# Altium PCB 1.PcbDoc
Units mm, origin at the board's own origin, x right, y up, seen from the top; angles counter-clockwise.
Board outline 13.5 x 15 mm, 2 copper layers (Top Layer, Bottom Layer); 13 components, 11 nets, 47 pads, 18 vias.
Unrouted connection lines stored in the file: 6.
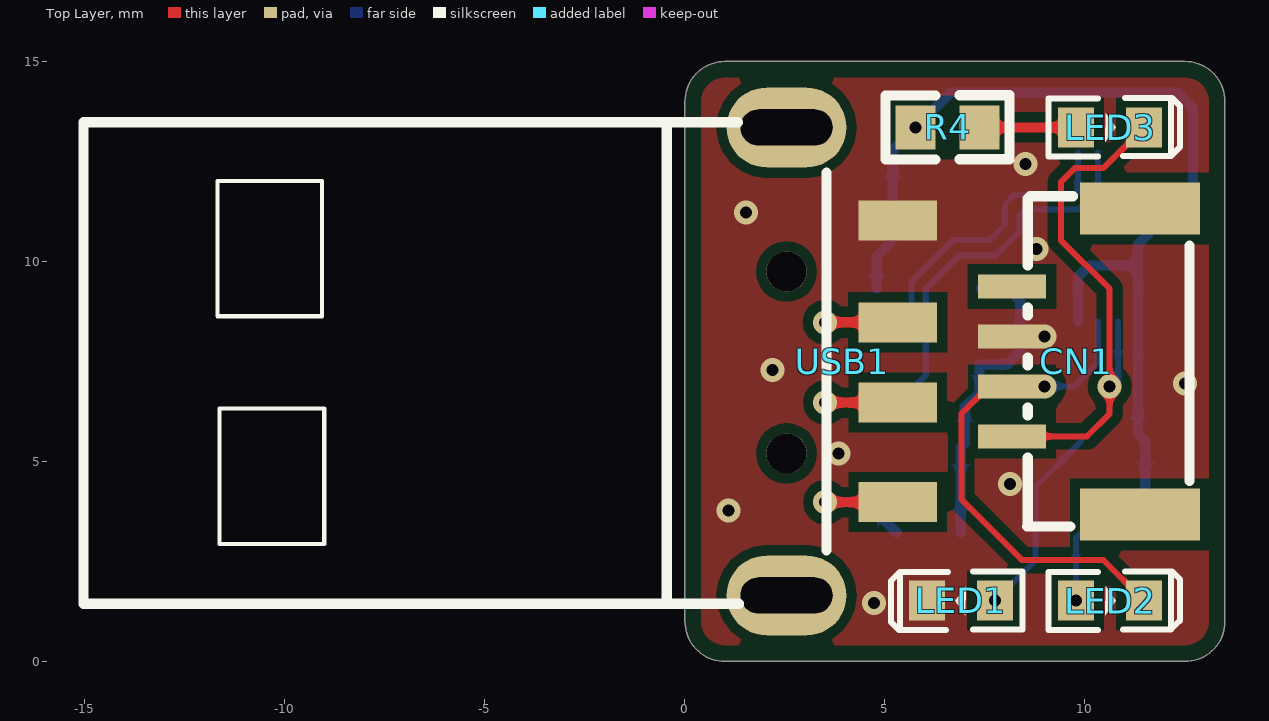
[diagram p0: Top Layer view]
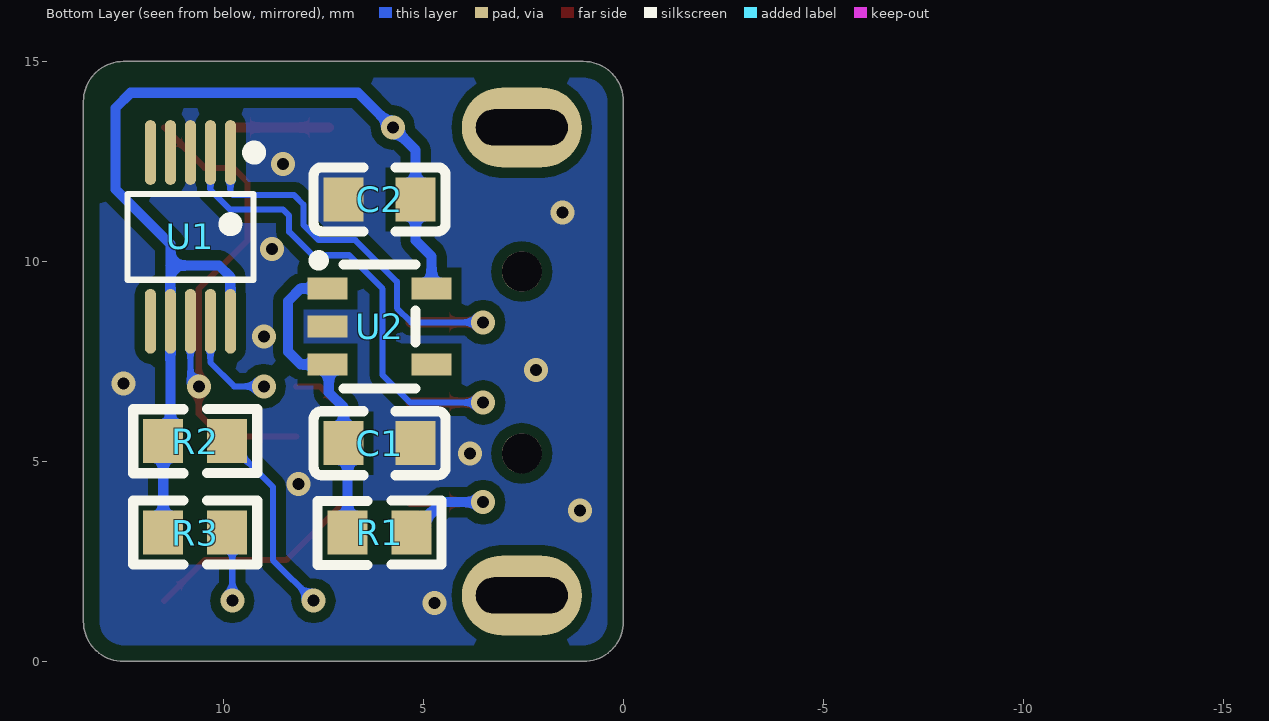
[diagram p1: Bottom Layer view, seen from below]

## Layer stack, top to bottom
Top Solder: solder mask 0.0102, Solder Resist, Dk 3.5
Top Layer: signal copper 0.0356
Dielectric 1: dielectric 0.32, FR-4, Dk 4.8
Bottom Layer: signal copper 0.0356
Bottom Solder: solder mask 0.0102, Solder Resist, Dk 3.5

## Board outline
0,1 ccw(c1,1) 1,0 12.5,0 ccw(c12.5,1) 13.5,1 13.5,14 ccw(c12.5,14) 12.5,15 1,15 ccw(c1,14) 0,14

## Design rules (kind name [scope] priority, off if disabled: settings)
BoardOutlineClearance [All] p1: gap=0.4 ignorepadtopadclearanceinfootprint=FALSE
Clearance Clearance_1 [InNamedPolygon('GND_L01_P000') Or  InNamedPolygon('GND_L02_P001')] p1: gap=0.254 ignorepadtopadclearanceinfootprint=FALSE except(0: Arc-Hole Track-Hole SMDPad-Hole THPad-Hole Via-Hole Fill-Hole Poly-Hole Region-Hole Text-Hole)
Clearance [All] p2: gap=0.152 ignorepadtopadclearanceinfootprint=FALSE
ComponentClearance [All] p1: gap=0 collisioncheckmode=3 verticalgap=0 showdistances=FALSE
MinimumSolderMaskSliver [All] p1: minsoldermaskwidth=0
PolygonConnect [All] p1: connectstyle=Direct reliefconductorwidth=0.254 reliefentries=4 polygonreliefangle="90 Angle" airgapwidth=0.254
RoutingVias [All] p1: holewidth=0.711 width=1.27 viastyle="Through Hole" minholewidth=0.711 minwidth=1.27 maxholewidth=0.711 maxwidth=1.27
SilkToSolderMaskClearance [IsPad] p1: minsilkscreentomaskgap=0 clearancetoexposedcopper=TRUE
SolderMaskExpansion [All] p1: expansion=0.102
Width [All] p1: maxlimit=0.254 minlimit=0.152 preferedwidth=0.152 minimp=50.000000 maximp=50.000000 favimp=50.000000
27 further rules are at their usual default settings.

## Components (designator, comment, footprint, x,y, rotation, side; value= is the part's Value field where it differs from the comment)
C1 "2.2uF" C0603 6.096,5.455 r180 bottom
C2 "2.2uF" C0603 6.096,11.551 r0 bottom
CN1 "A1257WR-S-4P" CONN-SMD_A1257WR-S-4P 9.779,7.5 r90 top
LED1 "LED-0603_R" LED0603_RED 6.897,1.518 r180 top
LED2 "LED-0603_R" LED0603_RED 10.629,1.518 r0 top
LED3 "LED-0603_R" LED0603_RED 10.629,13.35 r0 top
R1 "0R" R0603 6.096,3.22 r0 bottom
R2 "1k" R0603 10.706,5.506 r180 bottom
R3 "1k" R0603 10.706,3.22 r180 bottom
R4 "1k" R0603 6.566,13.35 r0 top
U1 "CH340E" MSOP-10_L3.0-W3.0-P0.50-LS5.0-BL 10.826,10.613 r180 bottom
U2 "WL2801E33-5/TR" SOT-23-5_L3.0-W1.7-P0.95-LS2.8-BR 6.096,8.376 r0 bottom
USB1 "" USB-TH_U-G-04WS-W-04 3.93,7.5 r270 top

## Footprints (in the part's own frame and the unit in brackets; to place one, negate y for a bottom-side part, rotate by r counter-clockwise, add the part's x,y. Pads: shape width x height; smd on the part's side, far side on the other; paste and mask are expansions set on the pad)
C0603 [mm]
  rect 1x1.1 smd: 1(-0.9,0) 2(0.9,0)
  silkscreen extent -1.65,-0.8 1.65,0.8
CONN-SMD_A1257WR-S-4P [mm]
  rect 0.6x1.7 smd: 1(1.874,1.6) 2(0.625,1.6) 3(-0.625,1.6) 4(-1.875,1.6)
  rect 1.3x3 smd: 5(3.825,-1.6) 6(-3.825,-1.6)
  silkscreen extent -4.13,-2.84 4.13,1.23
LED0603_RED [mm]
  rect 0.9x1 smd: 1(-0.85,0) 2(0.85,0)
  silkscreen extent -1.54,-0.73 1.75,0.73
MSOP-10_L3.0-W3.0-P0.50-LS5.0-BL [mm]
  oval 0.28x1.62 smd: 1(1,2.11) 2(0.5,2.11) 3(0,2.11) 4(-0.5,2.11) 5(-1,2.11) 6(-1,-2.11) 7(-0.5,-2.11) 8(0,-2.11) 9(0.5,-2.11) 10(1,-2.11)
  silkscreen extent -1.58,-1.07 1.74,2.26
R0603 [mm]
  rect 1x1.1 smd: 1(-0.8,0) 2(0.8,0)
  silkscreen extent -1.55,-0.8 1.55,0.81
SOT-23-5_L3.0-W1.7-P0.95-LS2.8-BR [mm]
  rect 1x0.55 smd: 1(1.3,-0.95) 2(1.3,0) 3(1.3,0.95) 4(-1.3,0.95) 5(-1.3,-0.95)
  silkscreen extent -0.9,-1.78 1.65,1.55
USB-TH_U-G-04WS-W-04 [mm]
  rect 1x1.96 smd: 1(3.518,1.39) 2(1.029,1.39) 3(-0.978,1.39) 4(-3.518,1.39)
  oval 2x3 hole 0.9 slot 2.3 at 90 deg: 5(5.85,-1.39) 6(-5.85,-1.39)
  round 1 hole 1 unplated: ""(-2.248,-1.39) ""(2.299,-1.39)
  silkscreen extent -5.98,-18.97 6.06,-0.39

## Part data
C1 C2: library part 0.1u, Contributor=LCEDA_Lib, nameAlias=Value(F), spicePre=C, spiceSymbolName=C_0603_US
CN1: BOM_Manufacturer="Changjiang Connectors", BOM_Manufacturer Part=A1257WR-S-4P, BOM_Supplier=LCSC, BOM_Supplier Part=C225127, Contributor=LCSC, spicePre=C, spiceSymbolName=A1257WR-S-4P
LED1 LED2 LED3: BOM_Manufacturer=EVERLIGHT(台湾, BOM_Manufacturer Part=19-217/R6C-AL1M2VY/3T, BOM_Supplier=LCSC, BOM_Supplier Part=C72044, Contributor=LCEDA_01, spicePre=L, spiceSymbolName=LED-0603_R
R1: library part 1k, Contributor=LCEDA_Lib, nameAlias=Value(Ω), spicePre=R, spiceSymbolName=R_0603_EU
U1: BOM_Manufacturer=WCH, BOM_Manufacturer Part=CH340E, BOM_Paste Type=recommend, BOM_Supplier=LCSC, BOM_Supplier Part=C99652, spicePre=U, spiceSymbolName=CH340E
U2: BOM_Manufacturer=WEIER, BOM_Manufacturer Part=WL2801E33-5/TR, BOM_Paste Type=expand, BOM_Supplier=LCSC, BOM_Supplier Part=C167141, Contributor=LCSC, spicePre=U, spiceSymbolName=WL2801E33-5/TR
USB1: library part U-G-04WS-W-04, BOM_Manufacturer="Korean Hroparts Elec", BOM_Manufacturer Part=U-G-04WS-W-04, BOM_Supplier=LCSC, BOM_Supplier Part=C879725, Contributor=LCSC, spicePre=U, spiceSymbolName=U-G-04WS-W-04
R2 R3 R4: Contributor=LCEDA_Lib, nameAlias=Value(Ω), spicePre=R, spiceSymbolName=R_0603_EU

## Via types
v1: diameter 0.6, hole 0.3, Top Layer to Bottom Layer, tented both sides, 18 vias

## Nets (pads, with @x,y where several pads share a name; then routed paths per layer and width w, separated by ;. In a path a pad name is that pad's centre, name@x,y a point inside that pad or via, vN(x,y) a via of type N, cw(c..) or ccw(c..) an arc to the next point about the centre after c; other vN are vias at no path point)
3V3: C2.1 R2.1 R3.1 R4.1 U1.7 U1.10 U2.5 | length 25.9
  Bottom Layer w0.254: U2.5 4.796,10.124 5.196,10.524 C2.1 5.196,12.78 v1(5.766,13.35) 6.634,14.218 12.319,14.218 12.7,13.837 12.7,11.805 11.326,10.431 11.326,9.9 ; U1.10 9.826,9.615 10.111,9.9 11.326,9.9 ; R3.1 R2.1 11.326,5.686 U1.7 11.326,9.9
5V: C1.1 R1.2 U2.1 U2.3 | length 7.9
  Bottom Layer w0.254: R1.2 6.896,5.355 C1.1 6.996,6.355 7.366,6.725 7.366,7.426 8.067,7.426 8.382,7.741 8.382,9.011 8.067,9.326 U2.1
D+: U1.1 USB1.3 | length 11.2
  Top Layer w0.254: v1(3.505,8.478) USB1.3
  Bottom Layer w0.152: v1(3.505,8.478) 5.309,8.478 5.664,8.833 5.664,9.494 6.706,10.535 7.62,10.535 8.001,10.916 8.001,11.424 8.234,11.657 9.758,11.657 9.826,11.725 U1.1
D-: U1.2 USB1.2 | length 13.3
  Top Layer w0.254: v1(3.505,6.471) USB1.2
  Bottom Layer w0.152: v1(3.505,6.471) 5.334,6.471 6.02,7.157 6.02,9.316 6.858,10.154 7.772,10.154 8.357,10.738 8.357,11.145 8.509,11.297 9.829,11.297 10.326,11.794 U1.2
GND: C1.2 C2.2 CN1.2 LED1.2 U1.3 U2.2 USB1.4
  other v1: 4.724,1.467 1.092,3.779 8.128,4.439 3.835,5.201 12.497,6.954 2.184,7.284 8.992,8.122 8.788,10.306 1.524,11.221 8.509,12.44
NetLED1_1: LED1.1 R2.2 | length 4.9
  Bottom Layer w0.152: v1(7.747,1.518) 8.763,2.534 8.763,4.363 R2.2
NetLED2_1: LED2.1 R3.2 | length 1.8
  Bottom Layer w0.152: v1(9.779,1.518) 9.779,3.093 R3.2
NetLED3_1: LED3.1 R4.2 | length 2.4
  Top Layer w0.254: R4.2 LED3.1
RX: CN1.3 LED2.2 U1.9 | length 11.9
  Top Layer w0.152: CN1.3 7.592,6.875 6.909,6.192 6.909,4.058 8.433,2.534 10.463,2.534 LED2.2
  Bottom Layer w0.152: v1(8.992,6.877) 9.73,6.877 10.326,7.473 U1.9
TX: CN1.4 LED3.2 U1.8 | length 13.3
  Top Layer w0.152: CN1.4 10.051,5.625 10.617,6.192 v1(10.617,6.877) 10.617,9.316 9.398,10.535 9.398,11.983 9.754,12.338 10.467,12.338 LED3.2
  Bottom Layer w0.152: v1(10.617,6.877) 10.826,7.086 U1.8
VUSB: R1.1 USB1.1 | length 3.9
  Top Layer w0.254: v1(3.505,3.982) USB1.1
  Bottom Layer w0.254: v1(3.505,3.982) 4.534,3.982 R1.1
pads on no net: CN1.1 CN1.5 CN1.6 U1.4 U1.5 U1.6 U2.4 USB1. USB1.5 USB1.6

## Polygon pours and split planes (outlines as drawn)
GND on Top Layer "GND_L01_P000" (solid, remove dead copper, pour order 0): 0,0 0,15 13.5,15 13.5,0
GND on Bottom Layer "GND_L02_P001" (solid, remove dead copper, pour order 1): 0,0 0,15 13.5,15 13.5,0

## Silkscreen, mask and mechanical layers (free items; w line width, h text height)
Mechanical 1:
  the board outline again, w0.254